# EAGLE board DAQ Terminal (EAGLE 8.6.0)
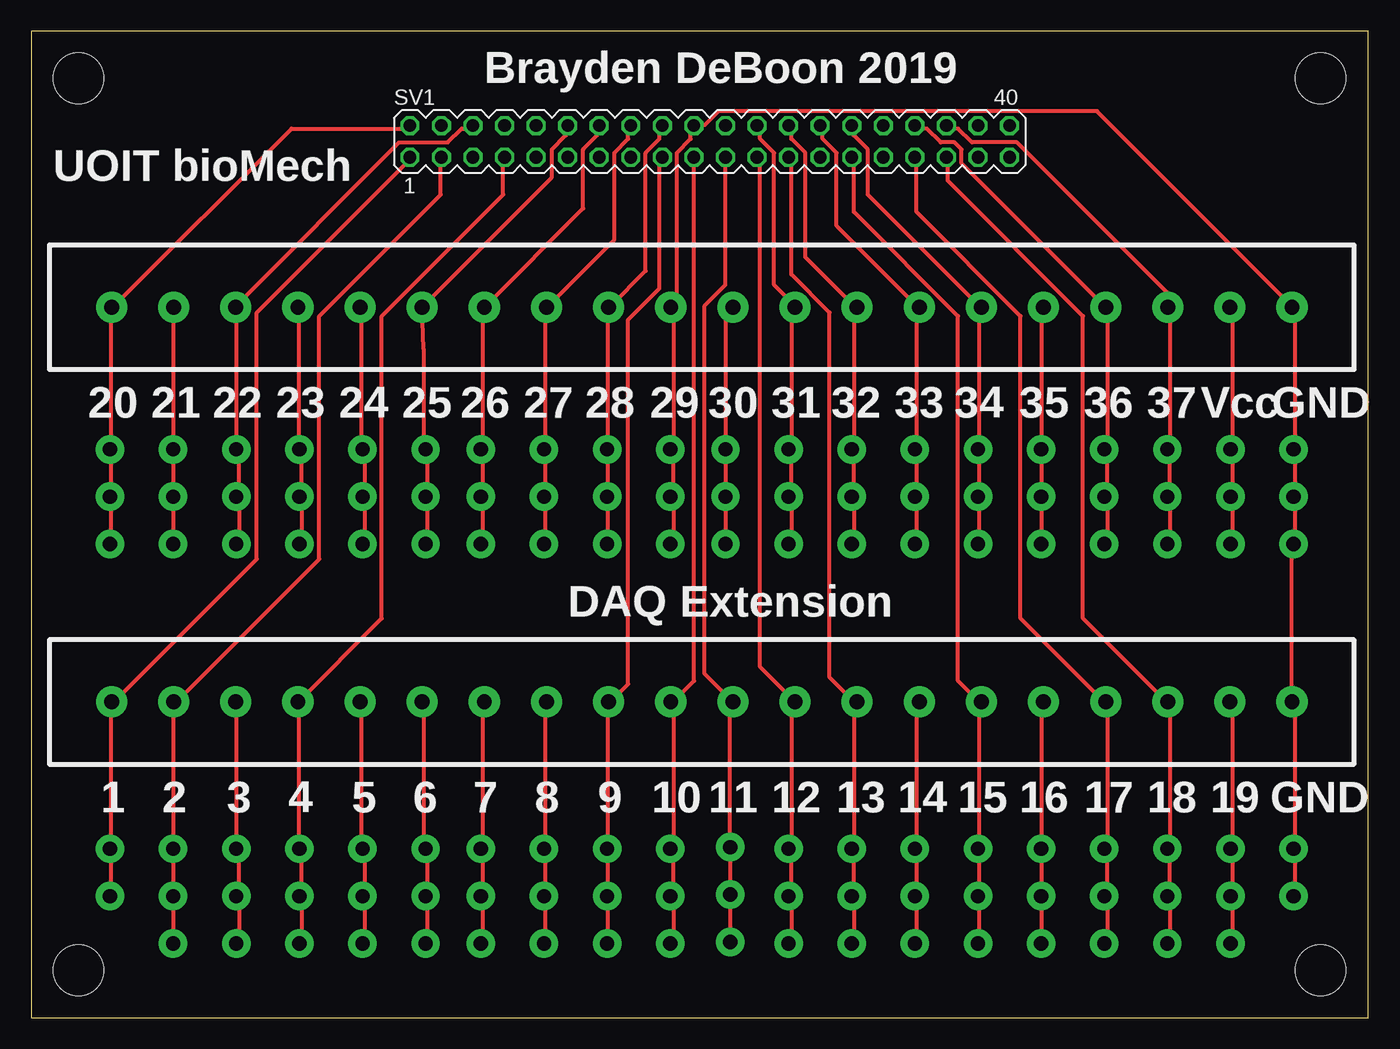
[diagram p0: board, top side]
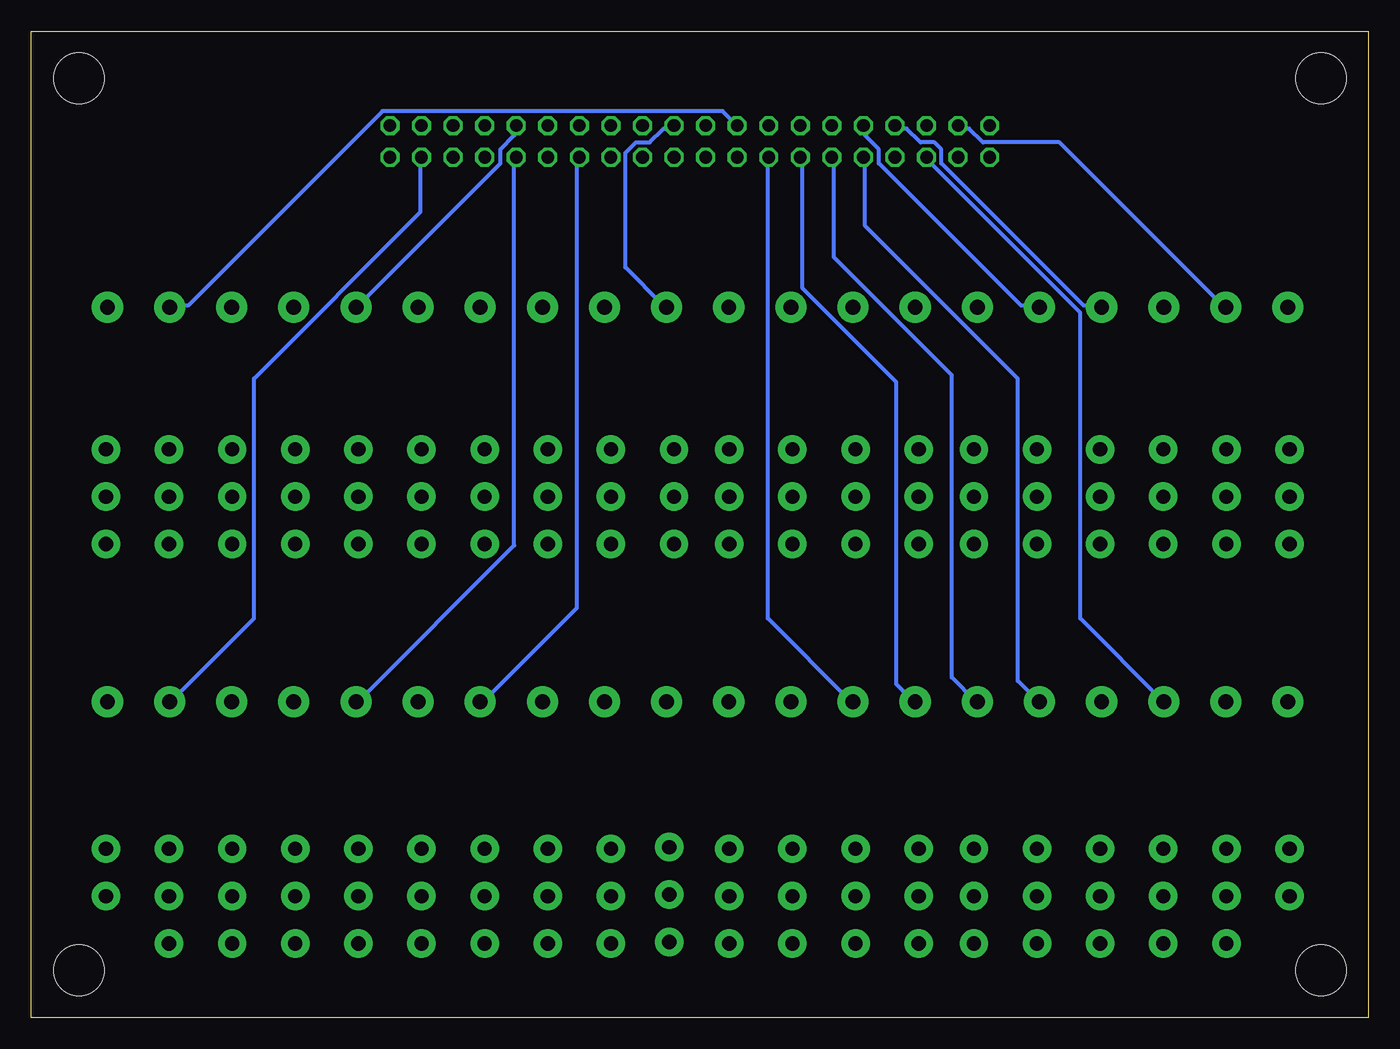
[diagram p1: board, bottom side, seen from below]

Size 107.62 x 79.36 mm. Coordinates in mm from the lower left corner, seen from the top.
Outline: 0,0 107.62,0 107.62,79.36 0,79.36 0,0
Copper layers (1*16): Top 0.035mm / dielectric 1.5mm / Bottom 0.035mm
Design rules "default *": minimum track width 12mil, minimum drill 0.35mm, track to track 10mil, track to pad 10mil, pad to pad 10mil, via to via 10mil, smd to smd 8mil, copper to edge 40mil, drill to drill 8mil, minimum pad ring 10mil, minimum via ring 8mil, stop-mask expansion 4mil, vias tented up to drill 0mil, thermal gap 10mil
Holes 4.06 mm at 3.81,3.81 3.81,75.56 103.76,75.56 103.76,3.81

## Footprints (pad centres in the part's own frame; a part is rotated, then mirrored left to right if it is on the bottom)
MA20-2 = drill 1.016 octagon: 1 -24.13,-1.27; 2 -24.13,1.27; 3 -21.59,-1.27; 4 -21.59,1.27; 5 -19.05,-1.27; 6 -19.05,1.27; 7 -16.51,-1.27; 8 -16.51,1.27; 9 -13.97,-1.27; 10 -13.97,1.27; 11 -11.43,-1.27; 12 -11.43,1.27; 13 -8.89,-1.27; 14 -8.89,1.27; 15 -6.35,-1.27; 16 -6.35,1.27; 17 -3.81,-1.27; 18 -3.81,1.27; 19 -1.27,-1.27; 20 -1.27,1.27; 21 1.27,-1.27; 22 1.27,1.27; 23 3.81,-1.27; 24 3.81,1.27; 25 6.35,-1.27; 26 6.35,1.27; 27 8.89,-1.27; 28 8.89,1.27; 29 11.43,-1.27; 30 11.43,1.27; 31 13.97,-1.27; 32 13.97,1.27; 33 16.51,-1.27; 34 16.51,1.27; 35 19.05,-1.27; 36 19.05,1.27; 37 21.59,-1.27; 38 21.59,1.27; 39 24.13,-1.27; 40 24.13,1.27
20TERM = drill 1.2 pad 2.5: P$1 -47.5,0; P$2 -42.5,0; P$3 -37.5,0; P$4 -32.5,0; P$5 -27.5,0; P$6 -22.5,0; P$7 -17.5,0; P$8 -12.5,0; P$9 -7.5,0; P$10 -2.5,0; P$11 2.5,0; P$12 7.5,0; P$13 12.5,0; P$14 17.5,0; P$15 22.5,0; P$16 27.5,0; P$17 32.5,0; P$18 37.5,0; P$19 42.5,0; P$20 47.5,0

## Placement (x,y rotation side)
SV1  [MA20-2]  54.61,70.48 0 top
U$1  20TERM  [20TERM]  53.98,25.4 0 top
U$2  20TERM  [20TERM]  53.98,57.15 0 top

## Library data of the parts
SV1 = con-lstb; OC_FARNELL: unknown; OC_NEWARK: unknown
U$1 U$2 = 20TERM

## Nets
GND: SV1.20 U$1.P$20 U$2.P$10 U$2.P$20
N$1: SV1.2 U$2.P$1
N$2: SV1.4 U$2.P$2
N$3: SV1.6 U$2.P$3
N$4: SV1.8 U$2.P$4
N$5: SV1.10 U$2.P$5
N$6: SV1.12 U$2.P$6
N$7: SV1.14 U$2.P$7
N$8: SV1.16 U$2.P$8
N$11: SV1.22 U$2.P$11
N$12: SV1.24 U$2.P$12
N$13: SV1.26 U$2.P$13
N$14: SV1.28 U$2.P$14
N$15: SV1.30 U$2.P$15
N$16: SV1.32 U$2.P$16
N$17: SV1.34 U$2.P$17
N$18: SV1.36 U$2.P$18
N$21: SV1.1 U$1.P$1
N$22: SV1.3 U$1.P$2
N$23: SV1.5 U$1.P$3
N$24: SV1.7 U$1.P$4
N$25: SV1.9 U$1.P$5
N$26: SV1.11 U$1.P$6
N$27: SV1.13 U$1.P$7
N$28: SV1.15 U$1.P$8
N$29: SV1.17 U$1.P$9
N$30: SV1.19 U$1.P$10
N$31: SV1.21 U$1.P$11
N$32: SV1.23 U$1.P$12
N$33: SV1.25 U$1.P$13
N$34: SV1.27 U$1.P$14
N$35: SV1.29 U$1.P$15
N$36: SV1.31 U$1.P$16
N$37: SV1.33 U$1.P$17
N$38: SV1.35 U$1.P$18
N$39: SV1.37 U$1.P$19
VCC: SV1.18 U$2.P$9 U$2.P$19

## Tracks (layer width: path | path; a pad name or v marks a point on that pad's centre or on a via)
GND  (via drill 1.14 pad 2.29)
  Top 0.305: v51.44,38.1 51.69,38.18 51.69,41.81 v51.44,41.91 51.69,42.09 51.69,45.72 | 51.69,45.72 51.69,57 U$2.P$10 51.69,57.28 51.97,57.56 51.97,69.57 53.09,70.69 53.09,71.53 SV1.20 53.37,71.81 54.2,71.81 55.32,72.92 85.78,72.92 101.42,57.28 U$2.P$20 101.7,57 101.7,45.72 | 51.69,45.72 v51.44,45.72 | 101.7,9.58 v101.6,9.78 101.7,9.86 101.7,13.49 v101.6,13.59 101.7,13.77 101.7,25.15 U$1.P$20 101.42,25.43 101.42,37.9 v101.6,38.1 101.7,38.18 101.7,41.81 v101.6,41.91 101.7,42.09 101.7,45.72 | 101.7,45.72 v101.6,45.72
N$1  (via drill 1.14 pad 2.29)
  Top 0.305: v6.35,38.1 6.43,38.18 6.43,41.81 v6.35,41.91 6.43,42.09 6.43,45.72 | 6.43,45.72 6.43,57 U$2.P$1 6.71,57.28 20.95,71.53 30.45,71.53 SV1.2 | 6.43,45.72 v6.35,45.72
N$2  (via drill 1.14 pad 2.29)
  Top 0.305: v11.43,38.1 11.46,38.18 11.46,41.81 v11.43,41.91 11.46,42.09 11.46,45.72 | 11.46,45.72 11.46,57 U$2.P$2 | 11.46,45.72 v11.43,45.72
  Bottom 0.305: SV1.4 32.97,71.53 32.13,71.53 31.01,70.41 24.87,70.41 11.73,57.28 U$2.P$2
N$3  (via drill 1.14 pad 2.29)
  Top 0.305: v16.51,38.1 16.76,38.18 16.76,41.81 v16.51,41.91 16.76,42.09 16.76,45.72 v16.51,45.72 16.48,45.72 16.48,57 U$2.P$3 16.48,57.28 29.62,70.41 33.53,70.41 34.65,71.53 35.48,71.53 SV1.6
N$4  (via drill 1.14 pad 2.29)
  Top 0.305: v21.59,38.1 21.79,38.18 21.79,41.81 v21.59,41.91 21.79,42.09 21.79,45.72 v21.59,45.72 21.51,45.72 21.51,57 U$2.P$4
  Bottom 0.305: SV1.8 38,71.53 37.16,71.53 36.04,70.41 34.92,70.41 34.37,69.85 34.37,68.73 22.91,57.28 21.51,57.28 U$2.P$4
N$5  (via drill 1.14 pad 2.29)
  Top 0.305: v26.67,38.1 26.82,38.18 26.82,41.81 v26.67,41.91 26.82,42.09 26.82,45.72 v26.67,45.72 26.54,45.72 26.54,57 U$2.P$5
  Bottom 0.305: SV1.10 40.51,71.53 40.51,70.97 39.4,69.85 39.4,68.73 27.94,57.28 26.54,57.28 U$2.P$5
N$6  (via drill 1.14 pad 2.29)
  Top 0.305: v31.75,38.1 31.85,38.18 31.85,41.81 v31.75,41.91 31.85,42.09 31.85,45.72 v31.75,45.72 31.57,45.72 31.57,53.82 U$2.P$6 31.57,57.28 41.91,67.61 41.91,69.85 43.03,70.97 43.03,71.53 SV1.12
N$7  (via drill 1.14 pad 2.29)
  Top 0.305: v36.2,38.1 36.32,38.18 36.32,41.81 v36.2,41.91 36.32,42.09 36.32,45.72 | 36.32,45.72 36.32,57 U$2.P$7 36.6,57.28 44.42,65.1 44.42,69.85 45.54,70.97 45.54,71.53 SV1.14 | 36.32,45.72 v36.2,45.72
N$8  (via drill 1.14 pad 2.29)
  Top 0.305: v41.27,38.1 41.35,38.18 41.35,41.81 v41.27,41.91 41.35,42.09 41.35,45.72 | 41.35,45.72 41.35,57 U$2.P$8 41.63,57.28 46.94,62.59 46.94,69.57 48.06,70.69 48.06,71.53 SV1.16 | 41.35,45.72 v41.27,45.72
N$11  (via drill 1.14 pad 2.29)
  Top 0.305: v55.88,38.1 v55.88,41.91 v55.88,45.72 55.88,56.44 56.44,57 U$2.P$11
  Bottom 0.305: SV1.22 55.88,71.53 56.72,71.53 57.84,70.41 58.95,70.41 59.79,69.57 59.79,60.35 56.72,57.28 U$2.P$11
N$12  (via drill 1.14 pad 2.29)
  Top 0.305: v60.96,38.1 61.19,38.18 61.19,41.81 v60.96,41.91 61.19,42.09 61.19,45.72 | 61.19,45.72 61.19,56.72 61.47,57 U$2.P$12 61.47,57.28 59.79,58.95 59.79,69.57 58.67,70.69 58.67,71.53 SV1.24 | 61.19,45.72 v60.96,45.72
N$13  (via drill 1.14 pad 2.29)
  Top 0.305: v66.04,38.1 66.22,38.18 66.22,41.81 v66.04,41.91 66.22,42.09 66.22,45.72 | 66.22,45.72 66.22,57 U$2.P$13 66.22,57.28 62.31,61.19 62.31,69.57 61.19,70.69 61.19,71.53 SV1.26 | 66.22,45.72 v66.04,45.72
N$14  (via drill 1.14 pad 2.29)
  Top 0.305: v71.12,38.1 71.25,38.18 71.25,41.81 v71.12,41.91 71.25,42.09 71.25,45.72 | 71.25,45.72 71.25,57 U$2.P$14 71.25,57.28 64.82,63.7 64.82,69.57 63.7,70.69 63.7,71.53 SV1.28 | 71.25,45.72 v71.12,45.72
N$15  (via drill 1.14 pad 2.29)
  Top 0.305: v76.2,38.1 76.28,38.18 76.28,41.81 v76.2,41.91 76.28,42.09 76.28,45.72 | 76.28,45.72 76.28,57 U$2.P$15 76.28,57.28 67.33,66.22 67.33,69.85 66.22,70.97 66.22,71.53 SV1.30 | 76.28,45.72 v76.2,45.72
N$16  (via drill 1.14 pad 2.29)
  Top 0.305: v81.28,38.1 81.31,38.18 81.31,41.81 v81.28,41.91 81.31,42.09 81.31,45.72 | 81.31,45.72 81.31,57 U$2.P$16 | 81.31,45.72 v81.28,45.72
  Bottom 0.305: SV1.32 68.73,71.53 68.73,70.97 69.85,69.85 69.85,68.73 81.31,57.28 U$2.P$16
N$17  (via drill 1.14 pad 2.29)
  Top 0.305: v86.36,38.1 86.61,38.18 86.61,41.81 v86.36,41.91 86.61,42.09 86.61,45.72 | 86.61,45.72 86.61,57 U$2.P$17 86.33,57.28 74.88,68.73 74.88,69.85 74.32,70.41 73.2,70.41 72.08,71.53 71.25,71.53 SV1.34 | 86.61,45.72 v86.36,45.72
N$18  (via drill 1.14 pad 2.29)
  Top 0.305: v91.44,38.1 91.64,38.18 91.64,41.81 v91.44,41.91 91.64,42.09 91.64,45.72 | 91.64,45.72 91.64,57 U$2.P$18 91.36,57.28 91.36,58.4 79.35,70.41 75.72,70.41 74.6,71.53 73.76,71.53 SV1.36 | 91.64,45.72 v91.44,45.72
N$21  (via drill 1.14 pad 2.29)
  Top 0.305: 6.43,9.58 v6.35,9.78 6.43,9.86 6.43,13.49 v6.35,13.59 6.43,13.77 6.43,25.15 U$1.P$1 6.71,25.43 18.16,36.88 18.16,56.72 30.45,69.01 SV1.1
N$22  (via drill 1.14 pad 2.29)
  Top 0.305: v11.43,5.97 11.46,6.22 11.46,9.58 v11.43,9.78 11.46,9.86 11.46,13.49 v11.43,13.59 11.46,13.77 11.46,25.15 U$1.P$2 11.73,25.43 23.19,36.88 23.19,56.44 32.97,66.22 32.97,69.01 SV1.3
N$23  (via drill 1.14 pad 2.29)
  Top 0.305: v16.51,5.97 16.76,6.22 16.76,9.58 v16.51,9.78 16.76,9.86 16.76,13.49 v16.51,13.59 16.48,13.77 16.48,25.15 U$1.P$3
  Bottom 0.305: SV1.5 35.48,69.01 23.19,56.72 23.19,32.13 16.48,25.43 U$1.P$3
N$24  (via drill 1.14 pad 2.29)
  Top 0.305: v21.59,5.97 21.79,6.22 21.79,9.58 v21.59,9.78 21.79,9.86 21.79,13.49 v21.59,13.59 21.51,13.77 21.51,25.15 U$1.P$4 21.51,25.43 28.22,32.13 28.22,56.44 38,66.22 38,69.01 SV1.7
N$25  (via drill 1.14 pad 2.29)
  Top 0.305: v26.67,5.97 26.82,6.22 26.82,9.58 v26.67,9.78 26.82,9.86 26.82,13.49 v26.67,13.59 26.54,13.77 26.54,25.15 U$1.P$5
  Bottom 0.305: SV1.9 40.51,69.01 40.51,63.7 28.22,51.41 28.22,27.1 26.54,25.43 U$1.P$5
N$26  (via drill 1.14 pad 2.29)
  Top 0.305: v31.75,5.97 31.85,6.22 31.85,9.58 v31.75,9.78 31.85,9.86 31.85,13.49 v31.75,13.59 31.57,13.77 31.57,25.15 U$1.P$6
  Bottom 0.305: SV1.11 43.03,69.01 43.03,61.19 33.53,51.69 33.53,27.38 31.57,25.43 U$1.P$6
N$27  (via drill 1.14 pad 2.29)
  Top 0.305: v36.2,5.97 36.32,6.22 36.32,9.58 v36.2,9.78 36.32,9.86 36.32,13.49 v36.2,13.59 36.32,13.77 36.32,25.15 U$1.P$7
  Bottom 0.305: SV1.13 45.54,69.01 45.54,58.67 38,51.13 38,26.82 36.6,25.43 U$1.P$7
N$28  (via drill 1.14 pad 2.29)
  Top 0.305: v41.27,5.97 41.35,6.22 41.35,9.58 v41.27,9.78 41.35,9.86 41.35,13.49 v41.27,13.59 41.35,13.77 41.35,25.15 U$1.P$8
  Bottom 0.305: SV1.15 48.34,69.01 48.34,32.13 41.63,25.43 U$1.P$8
N$29  (via drill 1.14 pad 2.29)
  Top 0.305: v46.35,5.97 46.38,6.22 46.38,9.58 v46.35,9.78 46.38,9.86 46.38,13.49 v46.35,13.59 46.38,13.77 46.38,25.15 U$1.P$9 46.66,25.43 48.06,26.82 48.06,56.16 50.57,58.67 50.57,69.01 SV1.17
N$30  (via drill 1.14 pad 2.29)
  Top 0.305: v51.44,5.97 51.69,6.22 51.69,9.58 v51.44,9.78 51.69,9.86 51.69,13.49 v51.44,13.59 51.69,13.77 51.69,25.15 U$1.P$10 51.69,25.43 53.37,27.1 53.37,69.01 SV1.19
N$31  (via drill 1.14 pad 2.29)
  Top 0.305: v56.26,6.1 v56.26,9.91 v56.26,13.72 56.26,25.19 U$1.P$11 | 55.88,24.59 56.44,25.15 U$1.P$11 | SV1.21 55.88,58.95 54.2,57.28 54.2,27.66 56.44,25.43 U$1.P$11
N$32  (via drill 1.14 pad 2.29)
  Top 0.305: v60.96,5.97 61.19,6.22 61.19,9.58 v60.96,9.78 61.19,9.86 61.19,13.49 v60.96,13.59 61.19,13.77 61.19,24.87 61.47,25.15 U$1.P$12 61.47,25.43 58.67,28.22 58.67,69.01 SV1.23
N$33  (via drill 1.14 pad 2.29)
  Top 0.305: v66.04,5.97 66.22,6.22 66.22,9.58 v66.04,9.78 66.22,9.86 66.22,13.49 v66.04,13.59 66.22,13.77 66.22,25.15 U$1.P$13 66.22,25.43 64.26,27.38 64.26,56.72 61.19,59.79 61.19,69.01 SV1.25
N$34  (via drill 1.14 pad 2.29)
  Top 0.305: v71.12,5.97 71.25,6.22 71.25,9.58 v71.12,9.78 71.25,9.86 71.25,13.49 v71.12,13.59 71.25,13.77 71.25,25.15 U$1.P$14
  Bottom 0.305: SV1.27 63.7,69.01 63.7,32.97 71.25,25.43 U$1.P$14
N$35  (via drill 1.14 pad 2.29)
  Top 0.305: v76.2,5.97 76.28,6.22 76.28,9.58 v76.2,9.78 76.28,9.86 76.28,13.49 v76.2,13.59 76.28,13.77 76.28,25.15 U$1.P$15 76.28,25.43 74.6,27.1 74.6,56.44 66.22,64.82 66.22,69.01 SV1.29
N$36  (via drill 1.14 pad 2.29)
  Top 0.305: v81.28,5.97 81.31,6.22 81.31,9.58 v81.28,9.78 81.31,9.86 81.31,13.49 v81.28,13.59 81.31,13.77 81.31,25.15 U$1.P$16
  Bottom 0.305: SV1.31 68.73,69.01 68.73,38 81.31,25.43 U$1.P$16
N$37  (via drill 1.14 pad 2.29)
  Top 0.305: v86.36,5.97 86.61,6.22 86.61,9.58 v86.36,9.78 86.61,9.86 86.61,13.49 v86.36,13.59 86.61,13.77 86.61,25.15 U$1.P$17 86.33,25.43 79.63,32.13 79.63,56.44 71.25,64.82 71.25,69.01 SV1.33
N$38  (via drill 1.14 pad 2.29)
  Top 0.305: v91.44,5.97 91.64,6.22 91.64,9.58 v91.44,9.78 91.64,9.86 91.64,13.49 v91.44,13.59 91.64,13.77 91.64,25.15 U$1.P$18 91.36,25.43 84.66,32.13 84.66,56.44 73.76,67.33 73.76,69.01 SV1.35
N$39  (via drill 1.14 pad 2.29)
  Top 0.305: v96.52,5.97 96.67,6.22 96.67,9.58 v96.52,9.78 96.67,9.86 96.67,13.49 v96.52,13.59 96.67,13.77 96.67,25.15 U$1.P$19
  Bottom 0.305: SV1.37 76.28,69.01 76.28,64.82 89.69,51.41 89.69,32.13 96.39,25.43 U$1.P$19
VCC  (via drill 1.14 pad 2.29)
  Top 0.305: v96.52,38.1 96.67,38.18 96.67,41.81 v96.52,41.91 96.67,42.09 96.67,45.72 | 96.67,45.72 96.67,57 U$2.P$19 | 96.67,45.72 v96.52,45.72 | v46.35,38.1 46.38,38.18 46.38,41.81 v46.35,41.91 46.38,42.09 46.38,45.72 | 46.38,45.72 46.38,57 U$2.P$9 46.66,57.28 49.45,60.07 49.45,69.57 50.57,70.69 50.57,71.53 SV1.18 | 46.38,45.72 v46.35,45.72
  Bottom 0.305: SV1.18 51.97,72.92 79.35,72.92 95,57.28 96.39,57.28 U$2.P$19

## Text on the board
tPlace: Brayden DeBoon 2019 | UOIT bioMech | 20 | 21 | 22 | 23 | 24 | 25 | 26 | 27 | 28 | 29 | 30 | 31 | 32 | 33 | 34 | 35 | 36 | 37 | Vcc | GND | DAQ Extension | 1 | 2 | 3 | 4 | 5 | 6 | 7 | 8 | 9 | 10 | 11 | 12 | 13 | 14 | 15 | 16 | 17 | 18 | 19 | GND